# Altium PCB 中板20190911.PCBDOC
Units mm, origin at the board's own origin, x right, y up, seen from the top; angles counter-clockwise.
Board outline 146 x 56 mm, 2 copper layers (Top Layer, Bottom Layer); 4 components, 41 nets, 122 pads, 0 vias.
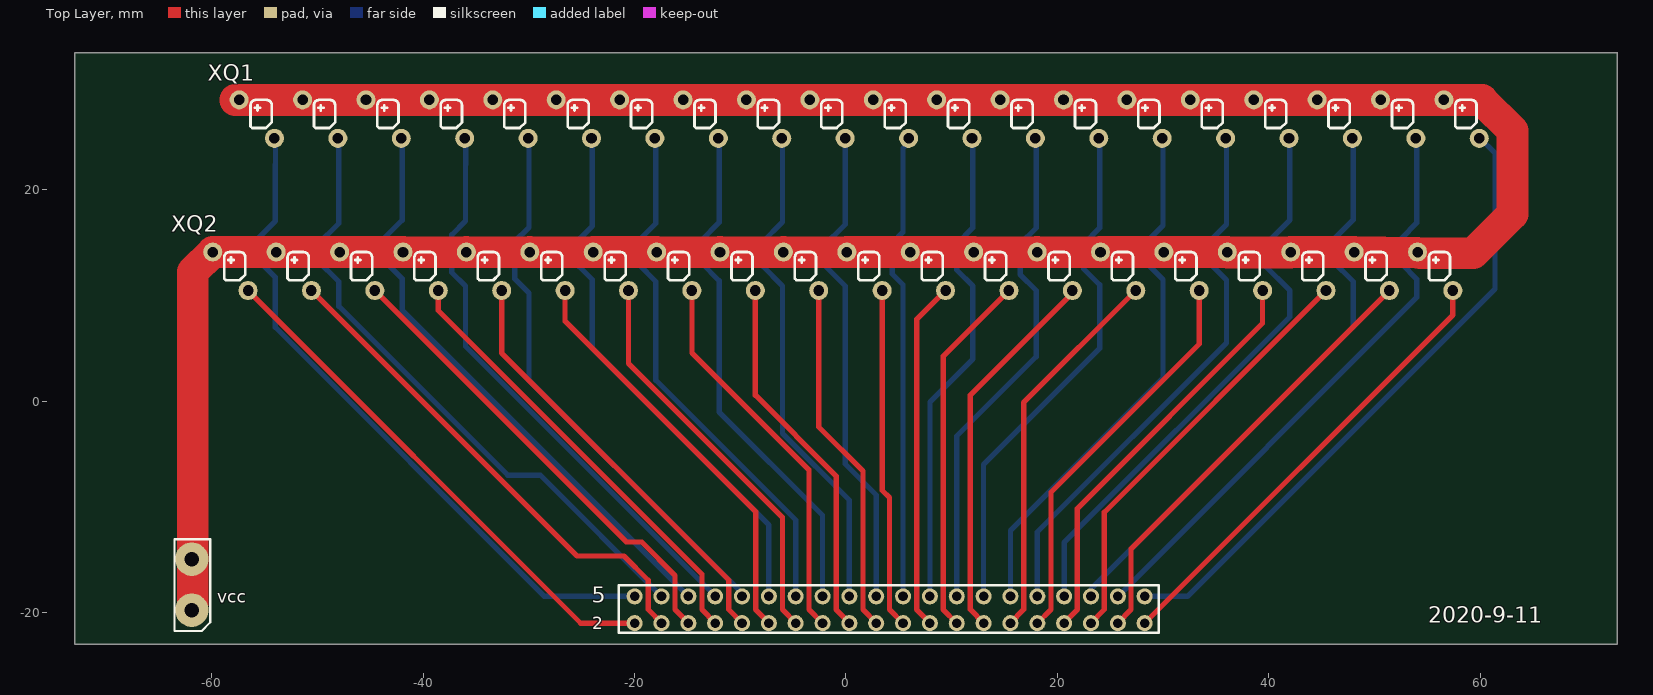
[diagram p0: Top Layer view]
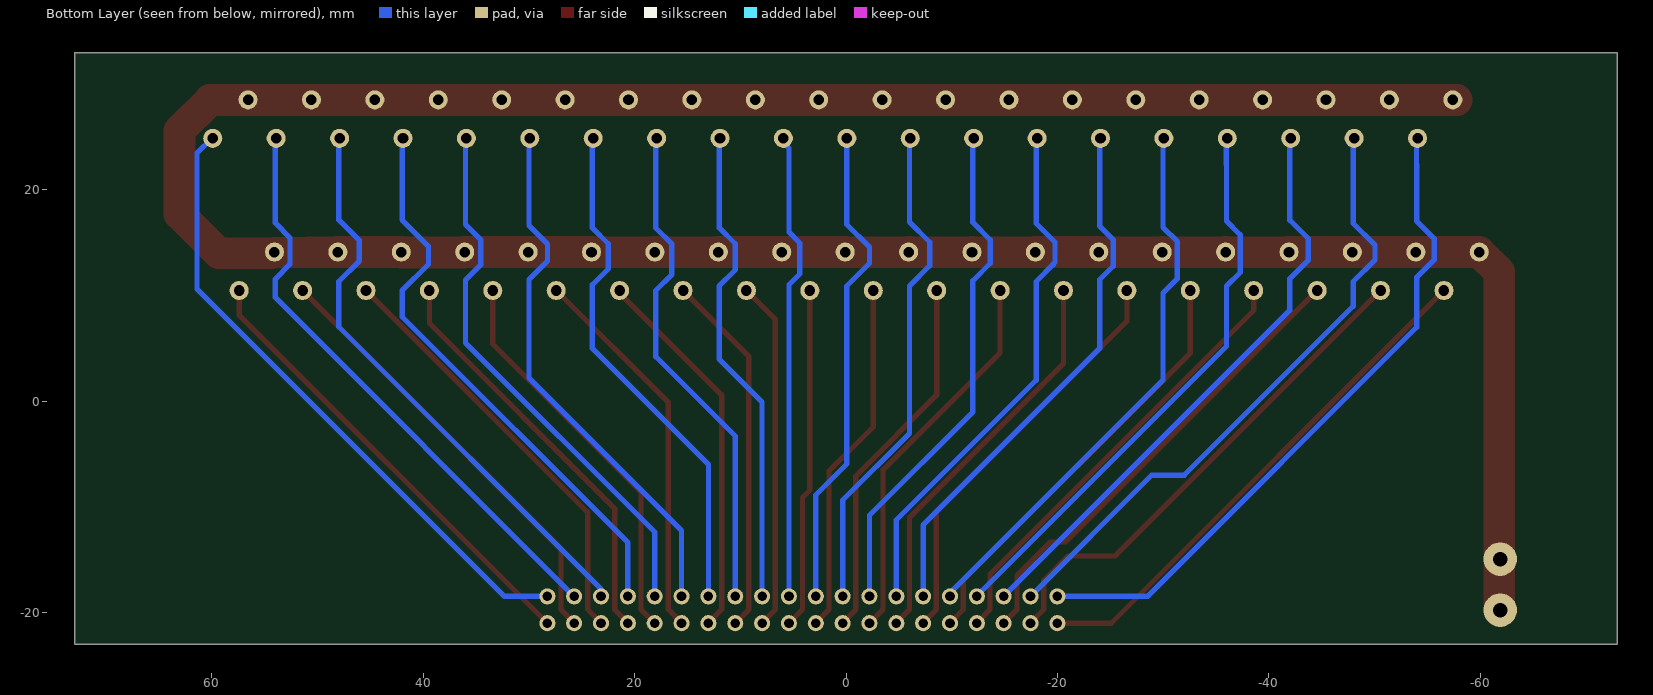
[diagram p1: Bottom Layer view, seen from below]

## Layer stack, top to bottom
Top Solder: solder mask 0.0102, Solder Resist, Dk 3.5
Top Layer: signal copper 0.0356
Dielectric1: dielectric 0.32, FR-4, Dk 4.8
Bottom Layer: signal copper 0.0356
Bottom Solder: solder mask 0.0102, Solder Resist, Dk 3.5

## Board outline
-73,-23 -73,33 73,33 73,-23

## Design rules (kind name [scope] priority, off if disabled: settings)
Clearance [All] p1: gap=0.152 ignorepadtopadclearanceinfootprint=FALSE
DiffPairsRouting [All] p1: maxlimit=0.254 minlimit=0.254 mostfreqgap=0.254 toplayer_minwidth=0.381 toplayer_maxwidth=4 toplayer_prefwidth=0.381 bottomlayer_minwidth=0.381 bottomlayer_maxwidth=4 bottomlayer_prefwidth=0.381 maxuncoupledlength=12.7
FabricationTestPointUsage TestPointUsage [All] p1: valid=0 allowmultiple=FALSE
FabricationTestpoint Testpoint [All] p1: side=3 testpointundercomponent=TRUE minsize=1.016 maxsize=2.54 preferedsize=1.524 minholesize=0 maxholesize=1.016 preferedholesize=0.813 testpointgrid=0.025 allowsidetop=TRUE allowsidebottom=TRUE usegrid=TRUE gridtolerance=0
PolygonConnect [All] p1: connectstyle=Relief reliefconductorwidth=0.254 reliefentries=4 polygonreliefangle="90 Angle" airgapwidth=0.254
RoutingVias [All] p1: holewidth=0.8 width=1.6 viastyle="Through Hole" minholewidth=0.711 minwidth=1.27 maxholewidth=0.711 maxwidth=1.27
SilkToSolderMaskClearance SilkscreenOverComponentPads [IsPad] p1: minsilkscreentomaskgap=0.254 clearancetoexposedcopper=TRUE
SolderMaskExpansion [All] p1: expansion=0.102 istentingtop=FALSE
Width [All] p1: maxlimit=5.08 minlimit=0.254 preferedwidth=0.381 minimp=50.000000 maximp=50.000000 favimp=50.000000
26 further rules are at their usual default settings.

## Classes and differential pairs
component class 盲文原理图1: 5

## Components (designator, comment, footprint, x,y, rotation, side; value= is the part's Value field where it differs from the comment)
5 "Header 21X2" XinPian -20,-21 r180 top (schematic designator 1)
XQ1 "Comment" XIANQUAN1 -57.42,28.52 r0 top
XQ2 "Comment" XIANQUAN1 -59.92,14.12 r0 top
? "" N1A -61.904,-14.939 r180 top

## Footprints (in the part's own frame and the unit in brackets; to place one, negate y for a bottom-side part, rotate by r counter-clockwise, add the part's x,y. Pads: shape width x height; smd on the part's side, far side on the other; paste and mask are expansions set on the pad)
N1A [mil]
  round 125 hole 55: 1(0,0) 2(0,190)
  silkscreen extent -69,-74 65,268
XIANQUAN1 [mm]
  round 1.8 hole 1: 1(3.34,-3.64) 1(9.34,-3.64) 1(15.34,-3.64) 1(21.34,-3.64) 1(27.34,-3.64) 1(33.34,-3.64) 1(39.34,-3.64) 1(45.34,-3.64) 1(51.34,-3.64) 1(57.34,-3.64) 1(63.34,-3.64) 1(69.34,-3.64) 1(75.34,-3.64) 1(81.34,-3.64) 1(87.34,-3.64) 1(93.34,-3.64) 1(99.34,-3.64) 1(105.34,-3.64) 1(111.34,-3.64) 1(117.34,-3.64) 2(0,0) 2(6,0) 2(12,0) 2(18,0) 2(24,0) 2(30,0) 2(36,0) 2(42,0) 2(48,0) 2(54,0) 2(60,0) 2(66,0) 2(72,0) 2(78,0) 2(84,0) 2(90,0) 2(96,0) 2(102,0) 2(108,0) 2(114,0)
  silkscreen extent 1.08,-2.67 117.08,0
XinPian [mil]
  round 60 hole 36: 1(0,-100) 2(-100,-100) 3(-200,-100) 4(-300,-100) 5(-400,-100) 6(-500,-100) 7(-600,-100) 8(-700,-100) 9(-800,-100) 10(-900,-100) 11(-1000,-100) 12(-1100,-100) 13(-1200,-100) 14(-1300,-100) 15(-1400,-100) 16(-1500,-100) 17(-1600,-100) 18(-1700,-100) 19(-1800,-100) 20(-1900,-100) 21(-1900,0) 22(-1800,0) 23(-1700,0) 24(-1600,0) 25(-1500,0) 26(-1400,0) 27(-1300,0) 28(-1200,0) 29(-1100,0) 30(-1000,0) 31(-900,0) 32(-800,0) 33(-700,0) 34(-600,0) 35(-500,0) 36(-400,0) 37(-300,0) 38(-200,0) 39(-100,0) 40(0,0)
  silkscreen extent -1953,-142 59,35

## Part data
5: library part "Header 22X2", "Header, 22-Pin, Dual row"

## Nets (pads, with @x,y where several pads share a name; then routed paths per layer and width w, separated by ;. In a path a pad name is that pad's centre, name@x,y a point inside that pad or via, vN(x,y) a via of type N, cw(c..) or ccw(c..) an arc to the next point about the centre after c; other vN are vias at no path point)
GND: ?.1 ?.2 XQ1.2 XQ2.2 | length 289
  Top Layer w2.54: ?.2 -61.8,-19.66 ?.2@-61.8,-19.115
  Top Layer w3: ?.2@-61.8,-19.115 -61.8,12.24 -59.92,14.12 -53.92,14.12 -47.92,14.12 -41.92,14.12 -41.9,14.1 -35.94,14.1 -35.92,14.12 -35.9,14.1 -29.94,14.1 -29.92,14.12 -29.9,14.1 -23.94,14.1 -23.92,14.12 -17.92,14.12 -17.9,14.1 -11.94,14.1 -11.92,14.12 -11.9,14.1 -5.94,14.1 -5.92,14.12 -5.9,14.1 0.06,14.1 0.08,14.12 6.08,14.12 XQ2.2@12.08,14.12 ; XQ1.2@-57.79,28.5 -45.42,28.5 -21.42,28.5 44.58,28.5 60.175,28.5 63.075,25.6 63.075,17.725 59.35,14 XQ2.2@54.332,14 ; XQ2.2@12.1,14.1 18.06,14.1 XQ2.2@18.08,14.12 ; XQ2.2@18.1,14.1 24.06,14.1 24.08,14.12 30.08,14.12 36.08,14.12 36.125,14.075 42.035,14.075 42.08,14.12 48.08,14.12 XQ2.2@54.066,14.046
XQ1_1: 5.20 XQ1.1@59.92,24.88 | length 60
  Bottom Layer w0.5: 5.20 32.315,-18.46 61.41,10.635 61.41,23.48 XQ1.1@60.01,24.88
XQ1_2: 5.19 XQ1.1@53.92,24.88 | length 56.2
  Bottom Layer w0.5: 5.19 54,9.82 54,11.575 52.6,12.975 52.6,15.459 54,16.859 54,24.87 XQ1.1@54.01,24.88
XQ1_3: 5.18 XQ1.1@47.92,24.88 | length 55.3
  Bottom Layer w0.381: 5.18 5.18@23.18,-17.77
  Bottom Layer w0.5: 5.18@23.18,-17.77 48,7.05 48,11.325 46.05,13.275 46.05,15.225 47.975,17.15 48,17.15 48,24.87 XQ1.1@48.01,24.88
XQ1_4: 5.17 XQ1.1@41.92,24.88 | length 54.3
  Bottom Layer w0.5: 5.17 20.64,-13.36 42,8 42,10.48 39.51,12.97 39.51,14.66 42,17.15 42,24.87 XQ1.1@42.01,24.88
XQ1_5: 5.16 XQ1.1@35.92,24.88 | length 52
  Bottom Layer w0.5: 5.16 18.1,-12.375 36,5.525 36,11.475 34.55,12.925 34.55,15.275 36,16.725 36,24.87 XQ1.1@36.01,24.88
XQ1_6: 5.15 XQ1.1@29.92,24.88 | length 50.8
  Bottom Layer w0.5: 5.15 15.56,-12.24 30,2.2 30,11.525 28.25,13.275 28.25,14.875 30,16.625 30,24.87 XQ1.1@30.01,24.88
XQ1_7: 5.14 XQ1.1@23.92,24.88 | length 49.1
  Bottom Layer w0.5: 5.14 13.02,-5.98 24,5 24,11.025 22.5,12.525 22.5,14.9 24,16.4 24,24.87 XQ1.1@24.01,24.88
XQ1_8: 5.13 XQ1.1@17.92,24.88 | length 47.7
  Bottom Layer w0.5: 5.13 10.48,-3.295 18,4.225 18,10.48 16.475,12.005 16.475,14.875 18,16.4 18,24.87 XQ1.1@18.01,24.88
XQ1_9: 5.12 XQ1.1@11.92,24.88 | length 46.3
  Bottom Layer w0.5: 5.12 7.94,-0.06 12,4 12,10.91 10.475,12.435 10.475,14.9 12,16.425 12,24.87 XQ1.1@12.01,24.88
XQ1_10: 5.11 XQ1.1@5.92,24.88 | length 44.4
  Bottom Layer w0.5: 5.11 5.4,11.025 4.375,12.05 4.375,14.975 5.4,16 5.4,23.937 6.01,24.547 XQ1.1@6.01,24.88
XQ1_11: 5.10 XQ1.1@-0.08,24.88 | length 46.4
  Bottom Layer w0.5: XQ1.1@0.01,24.88 -0.075,24.795 -0.075,16.725 -2.22,14.58 -2.22,13.055 -0.075,10.91 -0.075,-5.925 2.86,-8.86 5.10
XQ1_12: 5.9 XQ1.1@-6.08,24.88 | length 47.6
  Bottom Layer w0.5: XQ1.1@-5.99,24.88 -6,24.87 -6,16.975 -7.925,15.05 -7.925,12.835 -6,10.91 -6,-3.05 0.32,-9.37 5.9
XQ1_13: 5.8 XQ1.1@-12.08,24.88 | length 48.8
  Bottom Layer w0.5: XQ1.1@-11.99,24.88 -12,24.87 -12,16.925 -13.65,15.275 -13.65,13.055 -12,11.405 -12,-1 -2.22,-10.78 5.8
XQ1_14: 5.7 XQ1.1@-18.08,24.88 | length 50.3
  Bottom Layer w0.5: XQ1.1@-17.99,24.88 -18,24.87 -18,16.825 -19.775,15.05 -19.775,13.575 -19.78,13.57 -19.78,13.155 -19.6,12.975 -19.6,12.925 -18,11.325 -18,2 -4.76,-11.24 5.7
XQ1_15: 5.6 XQ1.1@-24.08,24.88 | length 51.3
  Bottom Layer w0.5: XQ1.1@-23.99,24.88 -24,24.87 -24,16.575 -25.275,15.3 -25.275,12.775 -24,11.5 -24,5 -7.3,-11.7 5.6
XQ1_16: 5.5 XQ1.1@-30.08,24.88 | length 52.8
  Bottom Layer w0.381: 5.5 5.5@-9.84,-18.16
  Bottom Layer w0.5: XQ1.1@-29.99,24.88 -30,24.87 -30,16.45 -31.35,15.1 -31.35,11.6 -30,10.25 -30,2 5.5@-9.84,-18.16
XQ1_17: 5.4 XQ1.1@-36.08,24.88 | length 54.4
  Bottom Layer w0.381: 5.4@-12.85,-17.941 -12.85,-18.333 -12.722,-18.46 5.4
  Bottom Layer w0.5: XQ1.1@-35.99,24.88 -35.99,22.4 -36,22.41 -36,17.05 -37.3,15.75 -37.3,12.2 -36,10.9 -36,5.209 5.4@-12.85,-17.941
XQ1_18: 5.3 XQ1.1@-42.08,24.88 | length 56
  Bottom Layer w0.5: XQ1.1@-41.99,24.88 -41.99,22.4 -42,22.41 -42,17.125 -43.75,15.375 -43.75,13.375 -42,11.625 -42,8.62 5.3
XQ1_19: 5.2 XQ1.1@-48.08,24.88 | length 59.5
  Bottom Layer w0.5: XQ1.1@-47.99,24.88 -48,24.87 -48,16.825 -50.05,14.775 -50.05,13.375 -48,11.325 -48,9 -32,-7 -28.92,-7 5.2
XQ1_20: 5.1 XQ1.1@-54.08,24.88 | length 63.8
  Bottom Layer w0.5: XQ1.1@-53.99,24.88 -53.99,22.4 -54,22.41 -54,17.05 -55.65,15.4 -55.65,13.375 -54,11.725 -54,7 -28.54,-18.46 5.1
XQ2_1: 5.21 XQ2.1@57.42,10.48 | length 43.6
  Top Layer w0.5: 5.21 57.42,8.16 XQ2.1@57.42,10.48
XQ2_2: 5.22 XQ2.1@51.42,10.48 | length 42.1
  Top Layer w0.381: 5.22 5.22@25.72,-20.965
  Top Layer w0.5: 5.22@25.72,-20.965 26.972,-19.713 26.972,-13.968 XQ2.1@51.42,10.48
XQ2_3: 5.23 XQ2.1@45.42,10.48 | length 40.7
  Top Layer w0.381: 5.23 5.23@23.18,-20.965
  Top Layer w0.5: 5.23@23.18,-20.965 24.432,-19.713 24.432,-10.508 XQ2.1@45.42,10.48
XQ2_4: 5.24 XQ2.1@39.42,10.48 | length 39.3
  Top Layer w0.381: 5.24 5.24@20.64,-20.965
  Top Layer w0.5: 5.24@20.64,-20.965 21.892,-19.713 21.892,-10.15 39.42,7.378 XQ2.1@39.42,10.48
XQ2_5: 5.25 XQ2.1@33.42,10.48 | length 37.8
  Top Layer w0.5: 5.25 19.387,-19.713 19.387,-8.612 33.42,5.42 XQ2.1@33.42,10.48
XQ2_6: 5.26 XQ2.1@27.42,10.48 | length 36.4
  Top Layer w0.381: 5.26 5.26@15.56,-20.965
  Top Layer w0.5: 5.26@15.56,-20.965 16.812,-19.713 16.812,-0.128 XQ2.1@27.42,10.48
XQ2_7: 5.27 XQ2.1@21.42,10.48 | length 36.3
  Top Layer w0.381: 5.27 5.27@13.02,-20.965
  Top Layer w0.5: 5.27@13.02,-20.965 11.767,-19.713 11.767,0.578 XQ2.1@21.799,10.61
XQ2_8: 5.28 XQ2.1@15.42,10.48 | length 34.6
  Top Layer w0.5: 5.28 9.192,-19.713 9.192,4.252 XQ2.1@15.42,10.48
XQ2_9: 5.29 XQ2.1@9.42,10.48 | length 33.1
  Top Layer w0.381: 5.29 5.29@7.94,-20.965
  Top Layer w0.5: 5.29@7.94,-20.965 6.687,-19.713 6.687,7.747 XQ2.1@9.42,10.48
XQ2_10: 5.30 XQ2.1@3.42,10.48 | length 32.3
  Top Layer w0.5: XQ2.1@3.42,10.48 3.42,-8.42 4.112,-9.112 4.112,-19.713 5.30
XQ2_11: 5.31 XQ2.1@-2.58,10.48 | length 33.7
  Top Layer w0.381: 5.31 5.31@2.86,-20.965
  Top Layer w0.5: XQ2.1@-2.58,10.48 -2.58,-2.42 1.607,-6.608 1.607,-19.713 5.31@2.86,-20.965
XQ2_12: 5.32 XQ2.1@-8.58,10.48 | length 35.2
  Top Layer w0.381: 5.32 5.32@0.32,-20.965
  Top Layer w0.5: XQ2.1@-8.58,10.48 -8.58,0.58 -0.933,-7.068 -0.933,-19.713 5.32@0.32,-20.965
XQ2_13: 5.33 XQ2.1@-14.58,10.48 | length 36.6
  Top Layer w0.5: XQ2.1@-14.58,10.48 -14.58,4.58 -3.508,-6.492 -3.508,-19.713 5.33
XQ2_14: 5.34 XQ2.1@-20.58,10.48 | length 38
  Top Layer w0.381: 5.34 5.34@-4.76,-20.965
  Top Layer w0.5: XQ2.1@-20.58,10.48 -20.58,3.58 -6.013,-10.988 -6.013,-19.713 5.34@-4.76,-20.965
XQ2_15: 5.35 XQ2.1@-26.58,10.48 | length 39.5
  Top Layer w0.381: 5.35 5.35@-7.3,-20.965
  Top Layer w0.5: XQ2.1@-26.58,10.48 -26.58,7.58 -8.553,-10.448 -8.553,-19.713 5.35@-7.3,-20.965
XQ2_16: 5.36 XQ2.1@-32.58,10.48 | length 40.9
  Top Layer w0.381: 5.36 5.36@-9.84,-20.965
  Top Layer w0.5: XQ2.1@-32.58,10.48 -32.58,4.58 -11.093,-16.907 -11.093,-19.713 5.36@-9.84,-20.965
XQ2_17: 5.37 XQ2.1@-38.58,10.48 | length 42.3
  Top Layer w0.381: 5.37 5.37@-12.38,-20.965
  Top Layer w0.5: XQ2.1@-38.58,10.48 -38.58,8.58 -13.633,-16.368 -13.633,-19.713 5.37@-12.38,-20.965
XQ2_18: 5.38 XQ2.1@-44.58,10.48 | length 44.6
  Top Layer w0.381: 5.38 5.38@-14.92,-20.965
  Top Layer w0.5: XQ2.1@-44.58,10.48 -20.781,-13.319 -19.331,-13.319 -16.173,-16.477 -16.173,-19.713 5.38@-14.92,-20.965
XQ2_19: 5.39 XQ2.1@-50.58,10.48 | length 47.8
  Top Layer w0.381: 5.39 5.39@-17.46,-20.965
  Top Layer w0.5: XQ2.1@-50.58,10.48 -25.45,-14.65 -21,-14.65 -18.713,-16.937 -18.713,-19.713 5.39@-17.46,-20.965
XQ2_20: 5.40 XQ2.1@-56.58,10.48 | length 49.6
  Top Layer w0.5: XQ2.1@-56.58,10.48 -25.1,-21 5.40

## Silkscreen, mask and mechanical layers (free items; w line width, h text height)
Top Overlay:
  text "vcc" at -59.475,-19.475 h2.02
  text "2020-9-11" at 55.1,-20.943 h1.52
  text "2" at -24,-22 h2.02
Mechanical 1:
  circle w0.254: c-67.5,19.5 r1.5
  circle w0.254: c-67.5,14 r1.5
  circle w0.254: c67.5,19.5 r1.5
  circle w0.254: c67.5,24.88 r1.5
  circle w0.254: c-67.5,25 r1.5
  circle w0.254: c24,0 r1.5
  circle w0.254: c-24,0 r1.5
  circle w0.254: c67.5,14.12 r1.5
  circle w0.254: c-55.75,19.49 r0.65
  circle w0.254: c-55.75,16.99 r0.65
  circle w0.254: c-58.25,16.99 r0.65
  circle w0.254: c-49.75,19.49 r0.65
  circle w0.254: c-49.75,21.99 r0.65
  circle w0.254: c-49.75,16.99 r0.65
  circle w0.254: c-52.25,19.49 r0.65
  circle w0.254: c-52.25,21.99 r0.65
  circle w0.254: c-52.25,16.99 r0.65
  circle w0.254: c-43.75,19.49 r0.65
  circle w0.254: c-43.75,21.99 r0.65
  circle w0.254: c-43.75,16.99 r0.65
  circle w0.254: c-46.25,19.49 r0.65
  circle w0.254: c-46.25,21.99 r0.65
  circle w0.254: c-46.25,16.99 r0.65
  circle w0.254: c-37.75,19.49 r0.65
  circle w0.254: c-37.75,21.99 r0.65
  circle w0.254: c-37.75,16.99 r0.65
  circle w0.254: c-40.25,19.49 r0.65
  circle w0.254: c-40.25,21.99 r0.65
  circle w0.254: c-40.25,16.99 r0.65
  circle w0.254: c-31.75,19.49 r0.65
  circle w0.254: c-31.75,21.99 r0.65
  circle w0.254: c-31.75,16.99 r0.65
  circle w0.254: c-34.25,19.49 r0.65
  circle w0.254: c-34.25,21.99 r0.65
  circle w0.254: c-34.25,16.99 r0.65
  circle w0.254: c-25.75,19.49 r0.65
  circle w0.254: c-25.75,21.99 r0.65
  circle w0.254: c-25.75,16.99 r0.65
  circle w0.254: c-28.25,19.49 r0.65
  circle w0.254: c-28.25,21.99 r0.65
  circle w0.254: c-28.25,16.99 r0.65
  circle w0.254: c-19.75,19.49 r0.65
  circle w0.254: c-19.75,21.99 r0.65
  circle w0.254: c-19.75,16.99 r0.65
  circle w0.254: c-22.25,19.49 r0.65
  circle w0.254: c-22.25,21.99 r0.65
  circle w0.254: c-22.25,16.99 r0.65
  circle w0.254: c-13.75,19.49 r0.65
  circle w0.254: c-13.75,21.99 r0.65
  circle w0.254: c-13.75,16.99 r0.65
  circle w0.254: c-16.25,19.49 r0.65
  circle w0.254: c-16.25,21.99 r0.65
  circle w0.254: c-16.25,16.99 r0.65
  circle w0.254: c-7.75,19.49 r0.65
  circle w0.254: c-7.75,21.99 r0.65
  circle w0.254: c-7.75,16.99 r0.65
  circle w0.254: c-10.25,19.49 r0.65
  circle w0.254: c-10.25,21.99 r0.65
  circle w0.254: c-10.25,16.99 r0.65
  circle w0.254: c58.25,19.49 r0.65
  circle w0.254: c58.25,21.99 r0.65
  circle w0.254: c58.25,16.99 r0.65
  circle w0.254: c55.75,19.49 r0.65
  circle w0.254: c55.75,21.99 r0.65
  circle w0.254: c55.75,16.99 r0.65
  circle w0.254: c52.25,19.49 r0.65
  circle w0.254: c52.25,21.99 r0.65
  circle w0.254: c52.25,16.99 r0.65
  circle w0.254: c49.75,19.49 r0.65
  circle w0.254: c49.75,21.99 r0.65
  circle w0.254: c49.75,16.99 r0.65
  circle w0.254: c46.25,19.49 r0.65
  circle w0.254: c46.25,21.99 r0.65
  circle w0.254: c46.25,16.99 r0.65
  circle w0.254: c43.75,19.49 r0.65
  circle w0.254: c43.75,21.99 r0.65
  circle w0.254: c43.75,16.99 r0.65
  circle w0.254: c40.25,19.49 r0.65
  circle w0.254: c40.25,21.99 r0.65
  circle w0.254: c40.25,16.99 r0.65
  circle w0.254: c37.75,19.49 r0.65
  circle w0.254: c37.75,21.99 r0.65
  circle w0.254: c37.75,16.99 r0.65
  circle w0.254: c34.25,19.49 r0.65
  circle w0.254: c34.25,21.99 r0.65
  circle w0.254: c34.25,16.99 r0.65
  circle w0.254: c31.75,19.49 r0.65
  circle w0.254: c31.75,21.99 r0.65
  circle w0.254: c31.75,16.99 r0.65
  circle w0.254: c28.25,19.49 r0.65
  circle w0.254: c28.25,21.99 r0.65
  circle w0.254: c28.25,16.99 r0.65
  circle w0.254: c25.75,19.49 r0.65
  circle w0.254: c25.75,21.99 r0.65
  circle w0.254: c25.75,16.99 r0.65
  circle w0.254: c22.25,19.49 r0.65
  circle w0.254: c22.25,21.99 r0.65
  circle w0.254: c22.25,16.99 r0.65
  circle w0.254: c19.75,19.49 r0.65
  circle w0.254: c19.75,21.99 r0.65
  circle w0.254: c19.75,16.99 r0.65
  circle w0.254: c16.25,19.49 r0.65
  circle w0.254: c16.25,21.99 r0.65
  circle w0.254: c16.25,16.99 r0.65
  circle w0.254: c13.75,19.49 r0.65
  circle w0.254: c13.75,21.99 r0.65
  circle w0.254: c13.75,16.99 r0.65
  circle w0.254: c10.25,19.49 r0.65
  circle w0.254: c10.25,21.99 r0.65
  circle w0.254: c10.25,16.99 r0.65
  circle w0.254: c7.75,19.49 r0.65
  circle w0.254: c7.75,21.99 r0.65
  circle w0.254: c7.75,16.99 r0.65
  circle w0.254: c4.25,19.49 r0.65
  circle w0.254: c4.25,21.99 r0.65
  circle w0.254: c4.25,16.99 r0.65
  circle w0.254: c1.75,19.49 r0.65
  circle w0.254: c1.75,21.99 r0.65
  circle w0.254: c1.75,16.99 r0.65
  circle w0.254: c-4.25,16.99 r0.65
  circle w0.254: c-4.25,21.99 r0.65
  circle w0.254: c-4.25,19.49 r0.65
  circle w0.254: c-1.75,16.99 r0.65
  circle w0.254: c-1.75,21.99 r0.65
  circle w0.254: c-1.75,19.49 r0.65
  circle w0.254: c-58.25,19.49 r0.65
  circle w0.254: c-55.75,21.99 r0.65
  circle w0.254: c-58.25,21.99 r0.65
  lines w0.254: 73,33 73,-23 -73,-23 -73,33 73,33 ; 73,33 73,33
Mechanical 13:
  lines w0.254: -73,-23 73,-23